# EAGLE board 20180608-iot (EAGLE 9.1.0)
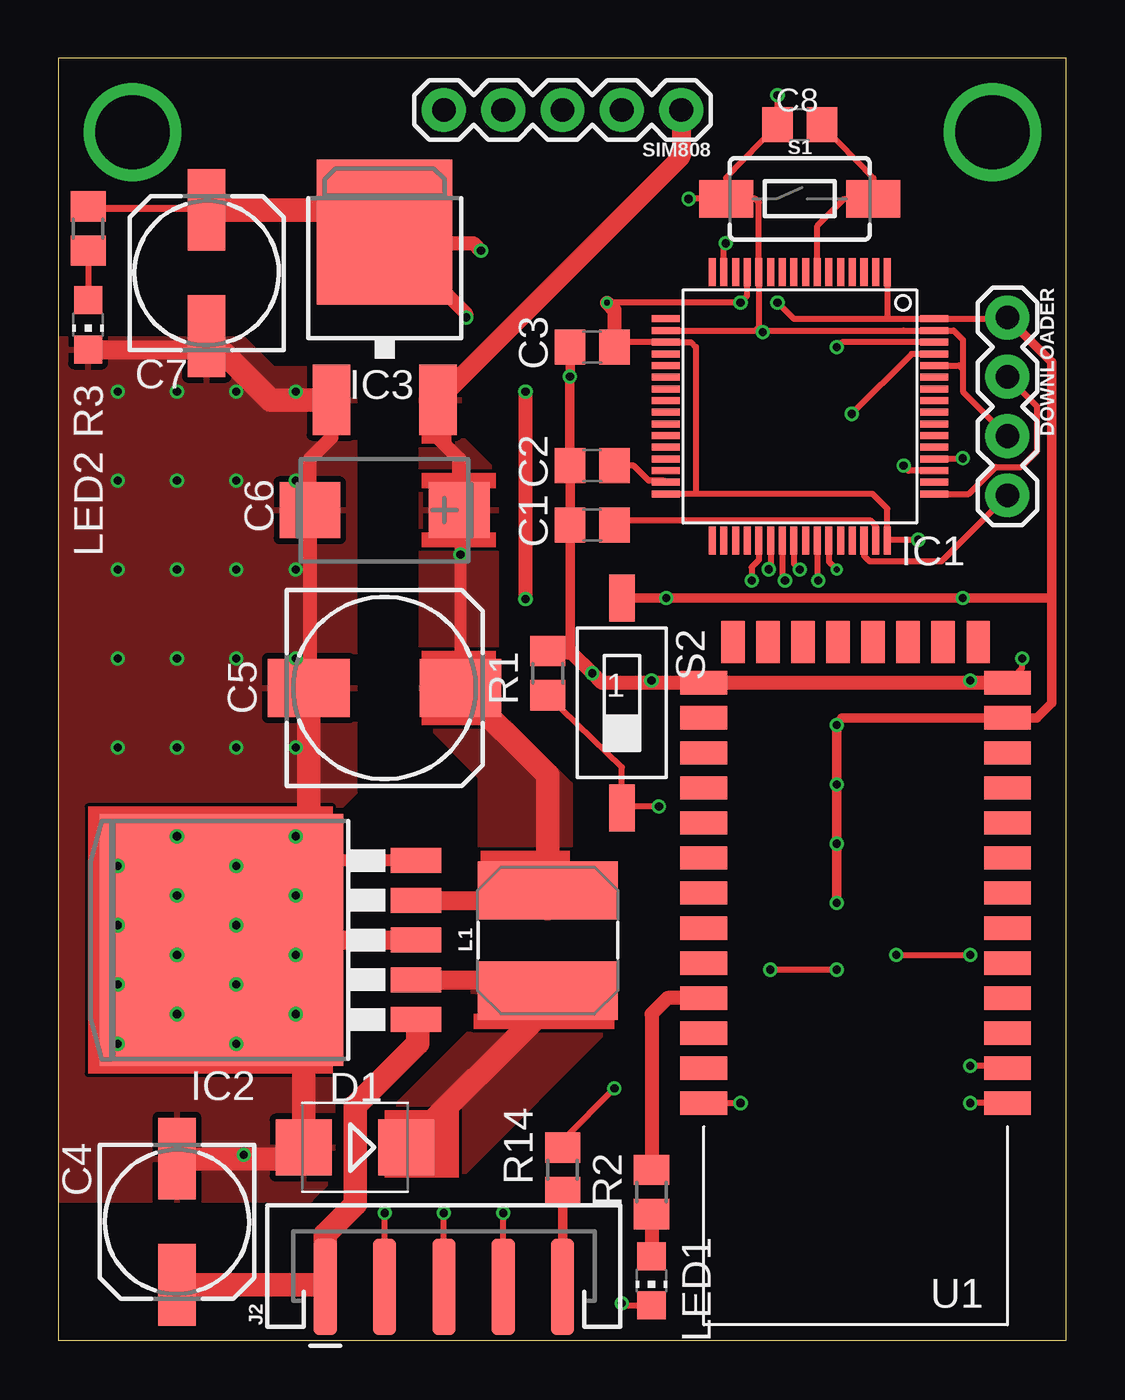
[diagram p0: board, top side]
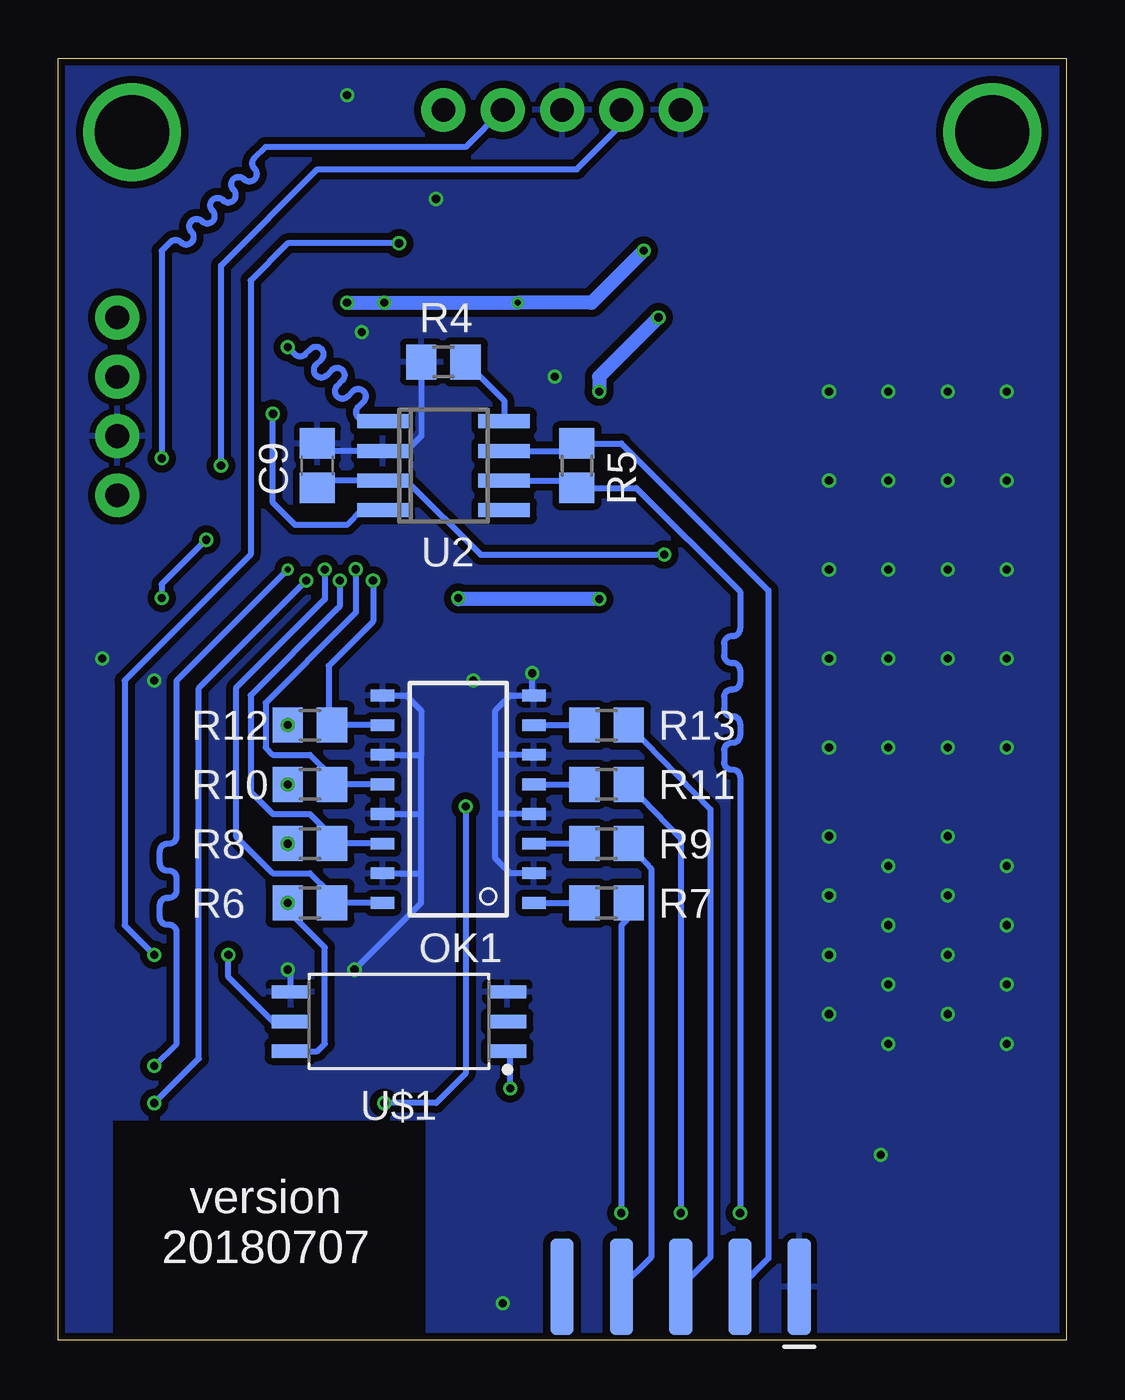
[diagram p1: board, bottom side, seen from below]

Size 43.16 x 54.91 mm. Coordinates in mm from the lower left corner, seen from the top.
Outline: 0,0 43.16,0 43.16,54.91 0,54.91 0,0
Copper layers (1*16): Top 0.035559375mm / dielectric 1.6mm / Bottom 0.035559375mm
Design rules "oshpark-2layer *": minimum track width 6mil, minimum drill 10mil, track to track 6mil, track to pad 6mil, pad to pad 6mil, via to via 6mil, smd to smd 6mil, copper to edge 1mil, drill to drill 6mil, minimum pad ring 5mil, minimum via ring 5mil, stop-mask expansion 2.5mil, vias tented up to drill 0mil, thermal gap 10mil

## Footprints (pad centres in the part's own frame; a part is rotated, then mirrored left to right if it is on the bottom)
C0805 = smd 1.3 x 1.5: 1 -0.95,0; 2 0.95,0
153CLV-0605 = smd 3.5 x 1.6: + 2.7,0; - -2.7,0
153CLV-0810 = smd 3.5 x 2.5: + 3.25,0; - -3.25,0
CT7343 = smd 2.6 x 2.4: + -3.2,0; - 3.2,0
SMB = smd 2.4 x 2.4: A 2.2,0; C -2.2,0
1X04 = drill 1.016 pad 1.88: 1 0,0; 2 2.54,0; 3 5.08,0; 4 7.62,0
LQFP64 = smd 0.3 x 1.2: 1 -3.75,-5.75; 2 -3.25,-5.75; 3 -2.75,-5.75; 4 -2.25,-5.75; 5 -1.75,-5.75; 6 -1.25,-5.75; 7 -0.75,-5.75; 8 -0.25,-5.75; 9 0.25,-5.75; 10 0.75,-5.75; 11 1.25,-5.75; 12 1.75,-5.75; 13 2.25,-5.75; 14 2.75,-5.75; 15 3.25,-5.75; 16 3.75,-5.75; 33 3.75,5.75; 34 3.25,5.75; 35 2.75,5.75; 36 2.25,5.75; 37 1.75,5.75; 38 1.25,5.75; 39 0.75,5.75; 40 0.25,5.75; 41 -0.25,5.75; 42 -0.75,5.75; 43 -1.25,5.75; 44 -1.75,5.75; 45 -2.25,5.75; 46 -2.75,5.75; 47 -3.25,5.75; 48 -3.75,5.75 | smd 1.2 x 0.3: 17 5.75,-3.75; 18 5.75,-3.25; 19 5.75,-2.75; 20 5.75,-2.25; 21 5.75,-1.75; 22 5.75,-1.25; 23 5.75,-0.75; 24 5.75,-0.25; 25 5.75,0.25; 26 5.75,0.75; 27 5.75,1.25; 28 5.75,1.75; 29 5.75,2.25; 30 5.75,2.75; 31 5.75,3.25; 32 5.75,3.75; 49 -5.75,3.75; 50 -5.75,3.25; 51 -5.75,2.75; 52 -5.75,2.25; 53 -5.75,1.75; 54 -5.75,1.25; 55 -5.75,0.75; 56 -5.75,0.25; 57 -5.75,-0.25; 58 -5.75,-0.75; 59 -5.75,-1.25; 60 -5.75,-1.75; 61 -5.75,-2.25; 62 -5.75,-2.75; 63 -5.75,-3.25; 64 -5.75,-3.75
TO263-5 = smd 1.067 x 2.159: 1 -3.404,-5.791; 2 -1.702,-5.791; 3 0,-5.791; 4 1.702,-5.791; 5 3.404,-5.791 | smd 10.8 x 10.41: 6 0,2.54
DPACK = smd 1.6 x 3: 1 -2.28,-4.8; 3 2.28,-4.8 | smd 5.8 x 6.2: 4 0,2.38
2X5-EDGE_SMD = smd 4.15 x 1: 1 -2.794,5.08; 3 -2.794,2.54; 5 -2.794,0; 7 -2.794,-2.54; 9 -2.794,-5.08 | smd 4.15 x 1 bottom: 2 -2.794,5.08; 4 -2.794,2.54; 6 -2.794,0; 8 -2.794,-2.54; 10 -2.794,-5.08
SRN6045 = smd 2.5 x 6: 1 -2.175,0; 2 2.125,0
CHIP-LED0805 = smd 1.2 x 1.2: A 0,-1.05; C 0,1.05
MINI-FLAT-16 = smd 1 x 0.5: 1 -3.24,4.445; 2 -3.24,3.175; 3 -3.24,1.905; 4 -3.24,0.635; 5 -3.24,-0.635; 6 -3.24,-1.905; 7 -3.24,-3.175; 8 -3.24,-4.445; 9 3.24,-4.445; 10 3.24,-3.175; 11 3.24,-1.905; 12 3.24,-0.635; 13 3.24,0.635; 14 3.24,1.905; 15 3.24,3.175; 16 3.24,4.445
R0805 = smd 1.3 x 1.5: 1 -0.95,0; 2 0.95,0
TACTILE_SWITCH_SMD_6.0X3.5MM = smd 2.3 x 1.6: 1 -3.15,0; 2 3.15,0
SMS-001 = smd 1.092 x 2.007: 1 0,-4.496; 2 0,4.496
1X05 = drill 1.016 pad 1.88: 1 0,0; 2 2.54,0; 3 5.08,0; 4 7.62,0; 5 10.16,0
BLUETOOTH_SMD = smd 2 x 1: 1 -6.35,3.81; 2 -6.35,2.31; 3 -6.35,0.81; 4 -6.35,-0.69; 5 -6.35,-2.19; 6 -6.35,-3.69; 7 -6.35,-5.19; 8 -6.35,-6.69; 9 -6.35,-8.19; 10 -6.35,-9.69; 11 -6.35,-11.19; 12 -6.35,-12.69; 13 -6.35,-14.19; 22 6.65,-14.19; 23 6.65,-12.69; 24 6.65,-11.19; 25 6.65,-9.69; 26 6.65,-8.19; 27 6.65,-6.69; 28 6.65,-5.19; 29 6.65,-3.69; 30 6.65,-2.19; 31 6.65,-0.69; 32 6.65,0.81; 33 6.65,2.31; 34 6.65,3.81 | smd 1 x 1.8: 14 -5.1,-15.94; 15 -3.6,-15.94; 16 -2.1,-15.94; 17 -0.6,-15.94; 18 0.9,-15.94; 19 2.4,-15.94; 20 3.9,-15.94; 21 5.4,-15.94
SO-08 = smd 0.6 x 2.2: 1 -1.905,-2.6; 2 -0.635,-2.6; 3 0.635,-2.6; 4 1.905,-2.6; 5 1.905,2.6; 6 0.635,2.6; 7 -0.635,2.6; 8 -1.905,2.6
SOIC127P1000X210-6 = smd 1.653 x 0.569: 1 -4.631,1.27; 2 -4.631,0; 3 -4.631,-1.27; 4 4.631,-1.27; 5 4.631,0; 6 4.631,1.27

## Placement (x,y rotation side)
C1  2.2uF  [C0805]  22.86,34.92 180 top
C2  2.2uF  [C0805]  22.86,37.47 180 top
C3  1uF  [C0805]  22.86,42.55 180 top
C4  [153CLV-0605]  5.08,5.08 270 top
C5  [153CLV-0810]  13.97,27.94 0 top
C6  [CT7343]  13.97,35.56 180 top
C7  [153CLV-0605]  6.35,45.72 90 top
C8  100nF  [C0805]  31.75,52.07 180 top
C9  0.1uF  [C0805]  32.07,37.47 90 bottom
D1  [SMB]  12.7,8.26 180 top
DOWNLOADER  [1X04]  40.64,43.81 270 top
IC1  STM32F405RGT  [LQFP64]  31.75,40.01 180 top
IC2  [TO263-5]  9.53,17.14 90 top
IC3  LD117ADT-TR  [DPACK]  13.97,45.09 0 top
J2  [2X5-EDGE_SMD]  16.51,5.08 90 top
L1  100µH  [SRN6045]  20.95,17.14 90 top
LED1  [CHIP-LED0805]  25.4,2.54 180 top
LED2  [CHIP-LED0805]  1.27,43.5 180 top
OK1  TLP283-4  [MINI-FLAT-16]  26.04,23.18 180 bottom
R1  10k  [R0805]  20.95,28.57 270 top
R2  1k  [R0805]  25.4,6.35 90 top
R3  1k  [R0805]  1.27,47.62 270 top
R4  10k  [R0805]  26.67,41.91 180 bottom
R5  120  [R0805]  20.95,37.47 270 bottom
R6  4k7  [R0805]  32.38,18.73 0 bottom
R7  1k  [R0805]  19.68,18.73 180 bottom
R8  4k7  [R0805]  32.38,21.27 0 bottom
R9  1k  [R0805]  19.68,21.27 180 bottom
R10  4k7  [R0805]  32.38,23.81 0 bottom
R11  1k  [R0805]  19.68,23.81 180 bottom
R12  4k7  [R0805]  32.38,26.35 0 bottom
R13  1k  [R0805]  19.68,26.35 180 bottom
R14  4k7  [R0805]  21.59,7.3 90 top
S1  [TACTILE_SWITCH_SMD_6.0X3.5MM]  31.75,48.9 0 top
S2  SWS001  [SMS-001]  24.13,27.3 180 top
SIM808  [1X05]  26.67,52.7 180 top
U1  HC_05  [BLUETOOTH_SMD]  34.29,13.97 180 top
U2  MCP2551SN  [SO-08]  26.67,37.47 270 bottom
U$1  TLP2735  [SOIC127P1000X210-6]  28.57,13.65 180 bottom

## Library data of the parts
C1-C9 = rcl; SPICEPREFIX: C
D1 = diode
DOWNLOADER = SparkFun-Connectors; PROD_ID: CONN-09696
IC1 = micro-stm_v3; SPICEPREFIX: X
IC2 = linear
IC3 = v-reg
J2 = edge-con
L1 = SparkFun-Coils; PROD_ID: NDUC-11627
LED1 LED2 = led
OK1 = optocoupler; OC_FARNELL: unknown; OC_NEWARK: unknown
R1-R14 = rcl; SPICEPREFIX: R
S1 = SparkFun-Switches; PROD_ID: SWCH-00815; SF_SKU: COM-08229
S2 = smd-special
SIM808 = SparkFun-Connectors
U1 = Bluetooth HC-05
U2 = microchip_can; SPICEPREFIX: X
U$1 = tlp2735

## Nets
+3V3: C3.1 C7.+ DOWNLOADER.1 IC1.1 IC1.13 IC1.19 IC1.32 IC1.48 IC1.64 IC3.4 R3.1 R6.1 R8.1 R10.1 R12.1 S2.1 U1.12 U$1.6
+5V: C5.+ C6.+ C9.1 IC2.4 IC3.3 L1.2 SIM808.1 U2.3
+12V: C4.+ IC2.1 J2.1
CANH: J2.4 R5.1 U2.7
CANL: J2.3 R5.2 U2.6
IN1: J2.7 R7.1
IN2: J2.8 R9.1
IN3: J2.5 R11.1
IN4: J2.6 R13.1
IN_1: IC1.40 OK1.16 R6.2
IN_2: IC1.39 OK1.14 R8.2
IN_3: IC1.38 OK1.12 R10.2
IN_4: IC1.37 OK1.10 R12.2
N$1: DOWNLOADER.2 IC1.49
N$2: DOWNLOADER.4 IC1.46
N$3: C1.1 IC1.47
N$4: C2.1 IC1.31
N$5: C8.1 IC1.7 S1.2
N$6: LED1.A R2.1
N$7: R1.2 S2.2 U1.34
N$8: R2.2 U1.31
N$9: LED2.A R3.2
N$10: R4.1 U2.8
N$13: OK1.1 R7.2
N$14: R14.2 U$1.1
N$16: OK1.3 R9.2
N$18: OK1.5 R11.2
N$21: OK1.7 R13.2
OUT: D1.C IC2.2 L1.1
PE: C1.2 C2.2 C3.2 C4.- C5.- C6.- C7.- C8.2 C9.2 D1.A DOWNLOADER.3 IC1.12 IC1.18 IC1.60 IC1.63 IC2.3 IC2.5 IC2.6 IC3.1 J2.2 LED1.C LED2.C OK1.2 OK1.4 OK1.6 OK1.8 OK1.9 OK1.11 OK1.13 OK1.15 R1.1 R4.2 S1.1 SIM808.3 SIM808.5 U1.13 U1.22 U2.2 U$1.3 U$1.4
RPM: IC1.15 U$1.5
RPM_IN: J2.9 R14.1
RX_CAN: IC1.61 U2.4
RX_HC05: IC1.43 U1.2
RX_SIM808: IC1.51 SIM808.4
TX_CAN: IC1.62 U2.1
TX_HC05: IC1.42 U1.1
TX_SIM808: IC1.52 SIM808.2
VREF: U2.5

## Tracks (layer width: path | path; a pad name or v marks a point on that pad's centre or on a via)
+3V3  (via drill 0.25, 0.35)
  Top 0.254: 27.3,36.26 34.87,36.26 35.5,35.62 IC1.48 35.53,34.29 v36.83,34.29 | 27.3,36.26 IC1.32 | 35.56,43.76 IC1.64 40.58,43.76 DOWNLOADER.1 | IC1.1 35.5,43.81 35.56,43.76 | 27.3,36.26 27.3,42.55 27.09,42.76 IC1.19 23.95,42.76 C3.1 23.81,42.62 | IC1.13 29.5,44.74 v29.21,44.45 v23.5,44.45 | IC3.4 14.45,46.99 | v30.8,44.45 31.49,43.76 35.56,43.76 | R12.1 | C7.+ 6.3,48.47 | 6.3,48.47
  Top 0.305: 6.3,48.47 1.37,48.47 R3.1
  Top 0.406: 42.55,31.75 42.55,27.3 41.9,26.66 U1.12 33.54,26.66 R12.1 R10.1 R8.1 R6.1 | 42.55,31.75 42.55,41.91 DOWNLOADER.1 | S2.1 v26.04,31.8 v38.73,31.8 42.49,31.8 42.55,31.75
  Top 0.61: U1.12 | 14.45,46.99 17.78,46.99 v18.1,46.67 | v23.5,44.45 23.81,44.13 C3.1 | IC3.4 17.46,43.97 v17.46,43.81 | v20,40.64 v20,31.75
  Top 1.016: 13.34,48.09 IC3.4 13.81,47.62 12.7,47.62 11.9,48.42 C7.+
  Bottom 0.254: U$1.6 32.07,12.38 31.75,12.7 31.75,16.83 33.23,18.31 R6.1 | v36.83,34.29 38.73,32.38 v38.73,31.8 | v38.73,31.8 38.73,31.75 v38.73,31.8
  Bottom 0.61: v18.1,46.67 20.32,44.45 v23.5,44.45 v30.8,44.45 | v17.46,43.81 20,41.27 v20,40.64 | v20,31.75 26.04,31.75 v26.04,31.8
  other vias: 33.34,18.73 33.34,26.35 33.34,23.81 33.34,21.27
+5V  (via drill 0.35)
  Top 0.508: C6.+ 17.22,35.51 v17.22,33.66 C5.+
  Top 0.61: C6.+ 17.17,37.76 16.19,38.73 16.19,40.14 16.3,40.24
  Top 0.813: IC2.4 20.53,18.85 L1.2 | SIM808.1 26.67,50.7 IC3.3
  Top 1.016: 16.37,40.06 arc45 16.3,40.24 IC3.3 | L1.2 20.95,24.2 C5.+ 16.67,28.49
  Bottom 0.254: C9.1 31.83,36.83 U2.3 28.26,36.83 25.08,33.66 v17.22,33.66
  pour Top: 18.1,20 18.1,24.13 15.56,26.67 15.56,41.59 17.14,41.59 17.14,38.73 18.73,37.15 18.73,26.99 21.91,23.81 21.91,20.64 21.91,18.1 18.1,18.1
+12V
  Top 1.016: IC2.1 15.4,13.66 15.4,12.72 12.72,10.05 12.72,5.83 11.43,4.54 J2.1 11.34,2.38 C4.+
CANH
  Bottom 0.254: U2.7 21.17,38.1 | 21.17,38.1 R5.1 19.05,38.41 12.75,32.12 12.75,3.5 J2.4 | 21.17,38.1 21.1,38.03
CANL  (via drill 0.35)
  Top 0.254: J2.3 v13.97,5.45
  Bottom 0.254: U2.6 21.17,36.83 R5.2 18.42,36.52 18.41,36.51 13.97,32.07 13.97,30.48 arc90 14.29,30.16 14.33,30.16 arc-90 14.65,29.84 14.65,29.34 arc-90 14.33,29.02 14.29,29.02 arc90 13.97,28.7 13.97,28.19 arc90 14.29,27.88 14.33,27.88 arc-90 14.65,27.56 14.65,27.05 arc-90 14.33,26.73 14.29,26.73 arc90 13.97,26.42 13.97,25.91 arc90 14.29,25.59 14.33,25.59 arc-90 14.65,25.27 14.65,24.77 arc-90 14.33,24.45 14.29,24.45 arc90 13.97,24.13 v13.97,5.45
IN1  (via drill 0.35)
  Top 0.254: J2.7 v19.05,5.45
  Bottom 0.254: R7.1 18.84,18 19.05,17.78 v19.05,5.45 19.05,5.4
IN2
  Bottom 0.254: R9.1 17.78,20.22 17.78,3.56 J2.8
IN3  (via drill 0.35)
  Top 0.254: J2.5 v16.51,5.45
  Bottom 0.254: R11.1 16.51,21.49 v16.51,5.45 16.51,5.4
IN4
  Bottom 0.254: R13.1 15.24,22.76 15.24,3.56 J2.6
IN_1  (via drill 0.35)
  Top 0.254: IC1.40 31.5,33.27 v31.75,33.02
  Bottom 0.254: OK1.16 R6.2 31.54,19.15 32.38,20 33.97,20 35.56,21.59 35.56,27.94 31.75,31.75 v31.75,33.02
IN_2  (via drill 0.35)
  Top 0.254: IC1.39 31,32.66 v31.11,32.54
  Bottom 0.254: OK1.14 R8.2 | R8.2 | R8.2 31.43,21.59 32.38,22.54 33.97,22.54 34.92,23.5 34.92,27.62 31.27,31.27 31.11,31.43 v31.11,32.54
IN_3  (via drill 0.35)
  Top 0.254: IC1.38 30.5,33.11 v30.42,33.03
  Bottom 0.254: OK1.12 R10.2 | R10.2 | R10.2 31.43,24.13 32.38,25.08 33.97,25.08 34.29,25.4 34.29,27.3 30.72,30.88 30.42,31.18 v30.42,33.03
IN_4  (via drill 0.35)
  Top 0.254: IC1.37 30,33.43 29.69,33.12 v29.69,32.54
  Bottom 0.254: OK1.10 R12.2 | 31.54,26.77 R12.2 | v29.69,32.54 29.69,30.8 31.59,28.89 31.59,26.41 R12.2
N$1
  Top 0.254: IC1.49 38.98,36.26 40.13,37.41 41.22,37.41 41.91,38.1 41.91,40.01 DOWNLOADER.2
N$2
  Top 0.254: IC1.46 34.5,33.61 34.73,33.38 37.82,33.38 DOWNLOADER.4
N$3
  Top 0.254: C1.1 23.94,35.13 34.77,35.13 35,34.9 IC1.47
N$4
  Top 0.254: IC1.31 25.93,36.83 25.28,36.83 24.64,37.47 C2.1
N$5
  Top 0.254: IC1.7 32.5,47.74 33.66,48.9 S1.2 34.9,49.8 C8.1
N$6
  Top 0.61: R2.1 LED1.A
N$7  (via drill 0.35)
  Top 0.254: U1.34 v29.21,10.16 | v25.72,22.86 24.18,22.86 S2.2 24.13,24.55 R1.2
  Bottom 0.254: v25.72,22.86 25.72,11.43 26.99,10.16 v29.21,10.16
N$8
  Top 0.61: U1.31 26.09,14.66 25.4,13.97 R2.2
N$9
  Top 0.254: R3.2 LED2.A
N$10
  Bottom 0.254: R4.1 24.07,40.26 U2.8
N$11  (via drill 3.17)
  other vias: 3.17,51.75
N$12  (via drill 3.17)
  other vias: 40.01,51.75
N$13
  Bottom 0.254: OK1.1 R7.2
N$14  (via drill 0.35)
  Top 0.254: R14.2 21.59,8.57 v23.81,10.79
  Bottom 0.254: v23.81,10.79 23.81,12.25 U$1.1
N$16
  Bottom 0.254: OK1.3 R9.2
N$18
  Bottom 0.254: OK1.5 R11.2
N$21
  Bottom 0.254: OK1.7 R13.2
OUT
  Top 0.813: IC2.2 21.75,15.44 L1.1
  Top 1.016: D1.C 20.95,14.31 L1.1
  pour Top: 13.97,9.53 17.78,13.34 17.78,15.24 23.81,15.24 23.81,13.65 17.14,6.99 13.97,6.99
PE  (via drill 0.35)
  Top 0.254: DOWNLOADER.3 38.73,40.64 38.73,41.59 | S1.1 29.84,48.9 30,48.74 IC1.12 30,43.41 | S1.1 28.6,49.8 C8.2 30.8,52.15 v30.8,53.34 | 29.84,43.26 IC1.18 30.09,43.26 v30.16,43.18 30,43.34 30,43.41 | 29.84,43.26 36.2,43.26 IC1.63 38.34,43.26 38.73,42.86 38.73,41.91 38.73,41.59 | 30,43.41 29.84,43.26 | 21.98,29.45 22.01,29.43 | IC1.60 38.57,41.76 38.73,41.59 | v24.13,1.59 24.23,1.49 LED1.C | S1.1 v26.99,48.9 | v39.05,28.26 39.15,28.16 40.01,28.16 | v33.34,15.88 v30.48,15.88 | U1.13 41.27,28.8 v41.27,29.21
  Top 0.406: 22.01,29.43 21.91,29.52 C1.2 C2.2 v21.91,41.27 v21.91,41.28 C3.2
  Top 0.508: IC2.5 11.2,20.55 10.79,20.95 10.79,17.14
  Top 0.61: U1.13 40.01,28.16 U1.22 23.27,28.16 v22.86,28.57 22.01,29.43 R1.1 | IC3.1 11.69,38.68 10.77,37.76 C6.- 10.77,27.99 C5.-
  Top 0.813: IC2.6 10.16,17.14 10.79,17.14 IC2.3 | LED2.C 6.25,42.45 6.35,42.55
  Top 1.016: 6.35,42.55 C7.- 9.09,40.28 IC3.1 | 11.27,28.49 C5.- 10.72,17.22 10.79,17.14 | 10.16,17.14 10.5,16.8 D1.A 10,7.75 C4.-
  Top 1.27: 10.94,21.09 10.79,20.95
  Bottom 0.254: OK1.15 27.62,20 | 27.62,20 27.62,22.54 | 27.62,22.54 27.62,25.08 | OK1.13 27.62,22.54 | OK1.11 27.62,25.08 | OK1.9 28.26,27.62 27.62,26.99 27.62,25.08 | OK1.2 23.81,20 24.45,20.64 24.45,22.54 | 24.45,22.54 24.45,25.08 | 24.45,25.08 24.45,26.99 23.81,27.62 OK1.8 22.86,27.69 v22.86,28.57 | OK1.6 24.45,25.08 | OK1.4 24.45,22.54 | C9.2 31.83,38.1 U2.2 28.26,38.1 27.62,38.74 R4.2 | U$1.4 33.21,15.74 v33.34,15.88 | v30.48,15.88 27.62,18.73 27.62,20
  other vias: 7.94,7.94 25.4,28.26 2.54,20.32 2.54,17.78 2.54,15.24 2.54,12.7 5.08,21.59 5.08,19.05 5.08,16.51 5.08,13.97 7.62,12.7 7.62,15.24 7.62,17.78 7.62,20.32 10.16,21.59 10.16,19.05 10.16,16.51 10.16,13.97 2.54,40.64 2.54,36.83 2.54,33.02 2.54,29.21 2.54,25.4 5.08,25.4 7.62,25.4 10.16,25.4 5.08,29.21 7.62,29.21 10.16,29.21 5.08,33.02 7.62,33.02 10.16,33.02 5.08,36.83 7.62,36.83 10.16,36.83 10.16,40.64 7.62,40.64 5.08,40.64
  pour Top: 0,6.03 10.79,6.03 11.75,6.99 11.75,22.54 12.7,23.5 12.7,41.59 9.21,41.59 7.94,42.86 0,42.86
  pour Bottom (isolate 0.305): 0,0 27.3,0 27.3,9.53 40.96,9.53 40.96,0 43.18,0 43.18,54.93 0,54.93
RPM  (via drill 0.35)
  Top 0.254: v35.88,16.51 v39.05,16.51 | IC1.15 28.5,46.91 v28.57,46.99
  Bottom 0.254: U$1.5 33.97,13.65 35.88,15.56 v35.88,16.51 | v28.57,46.99 33.34,46.99 34.92,45.4 34.92,33.66 40.32,28.26 40.32,17.78 v39.05,16.51
RPM_IN
  Top 0.406: R14.1 J2.9
RX_CAN  (via drill 0.35)
  Top 0.254: IC1.61 36.54,42.26 v33.97,39.69
  Bottom 0.254: U2.4 30.16,35.56 30.8,34.92 33.02,34.92 33.97,35.88 v33.97,39.69
RX_HC05  (via drill 0.25, 0.35)
  Top 0.254: v39.05,11.75 40.55,11.75 U1.2 | IC1.43 33,33.36 v33.34,33.02
  Bottom 0.254: v33.34,33.02 38.1,28.26 38.1,21.59 arc90 38.42,21.27 38.49,21.27 arc-90 38.81,20.95 38.81,20.43 arc-90 38.49,20.11 38.42,20.11 arc90 38.1,19.8 38.1,19.27 arc90 38.42,18.95 38.49,18.95 arc-90 38.81,18.64 38.81,18.11 arc-90 38.49,17.8 38.42,17.8 arc90 38.1,17.48 38.1,12.7 v39.05,11.75
RX_SIM808  (via drill 0.35)
  Top 0.254: IC1.51 36.41,37.26 v36.2,37.47
  Bottom 0.254: SIM808.4 19.05,52.07 20.95,50.16 32.07,50.16 36.2,46.04 v36.2,37.47
TX_CAN  (via drill 0.35)
  Top 0.254: IC1.62 33.55,42.76 v33.34,42.55
  Bottom 0.254: U2.1 30.16,39.37 30.32,39.53 arc90 30.32,39.98 30.09,40.21 arc-90 30.09,40.66 30.09,40.66 arc-90 30.54,40.66 30.77,40.43 arc90 31.22,40.43 31.23,40.43 arc90 31.23,40.88 31,41.11 arc-90 31,41.56 31,41.56 arc-90 31.45,41.56 31.68,41.33 arc90 32.13,41.33 32.13,41.34 arc90 32.13,41.79 31.9,42.02 arc-90 31.9,42.47 31.9,42.47 arc-90 32.35,42.47 32.58,42.24 arc90 33.03,42.24 v33.34,42.55
TX_HC05  (via drill 0.35)
  Top 0.254: IC1.42 32.5,32.59 v32.54,32.54 | U1.1 v39.05,10.16
  Bottom 0.254: v32.54,32.54 37.15,27.94 37.15,12.06 v39.05,10.16
TX_SIM808  (via drill 0.35)
  Top 0.254: v38.73,37.78 38.71,37.76 IC1.52
  Bottom 0.254: SIM808.2 25.72,51.12 34.29,51.12 34.77,50.64 arc-90 34.77,50.19 34.76,50.18 arc90 34.76,49.73 34.76,49.73 arc90 35.21,49.73 35.22,49.74 arc-90 35.66,49.74 35.67,49.74 arc-90 35.67,49.29 35.66,49.28 arc90 35.66,48.83 35.66,48.83 arc90 36.11,48.83 36.12,48.84 arc-90 36.57,48.84 36.57,48.84 arc-90 36.57,48.39 36.56,48.38 arc90 36.56,47.93 36.56,47.93 arc90 37.01,47.93 37.02,47.94 arc-90 37.47,47.94 37.47,47.94 arc-90 37.47,47.49 37.46,47.48 arc90 37.46,47.03 37.46,47.03 arc90 37.91,47.03 37.92,47.04 arc-90 38.37,47.04 38.73,46.67 v38.73,37.78
(copper drawn outside any net)
  shapes: Top area x9

## Text on the board
bNames: version / 20180707